# Altium PCB UKU208.PcbDoc (part 1 of 2)
Units mm, origin at the board's own origin, x right, y up, seen from the top; angles counter-clockwise.
Board outline 222.4 x 162.3 mm, 2 copper layers (Top Layer, Bottom Layer); 178 components, 227 nets, 717 pads, 311 vias.
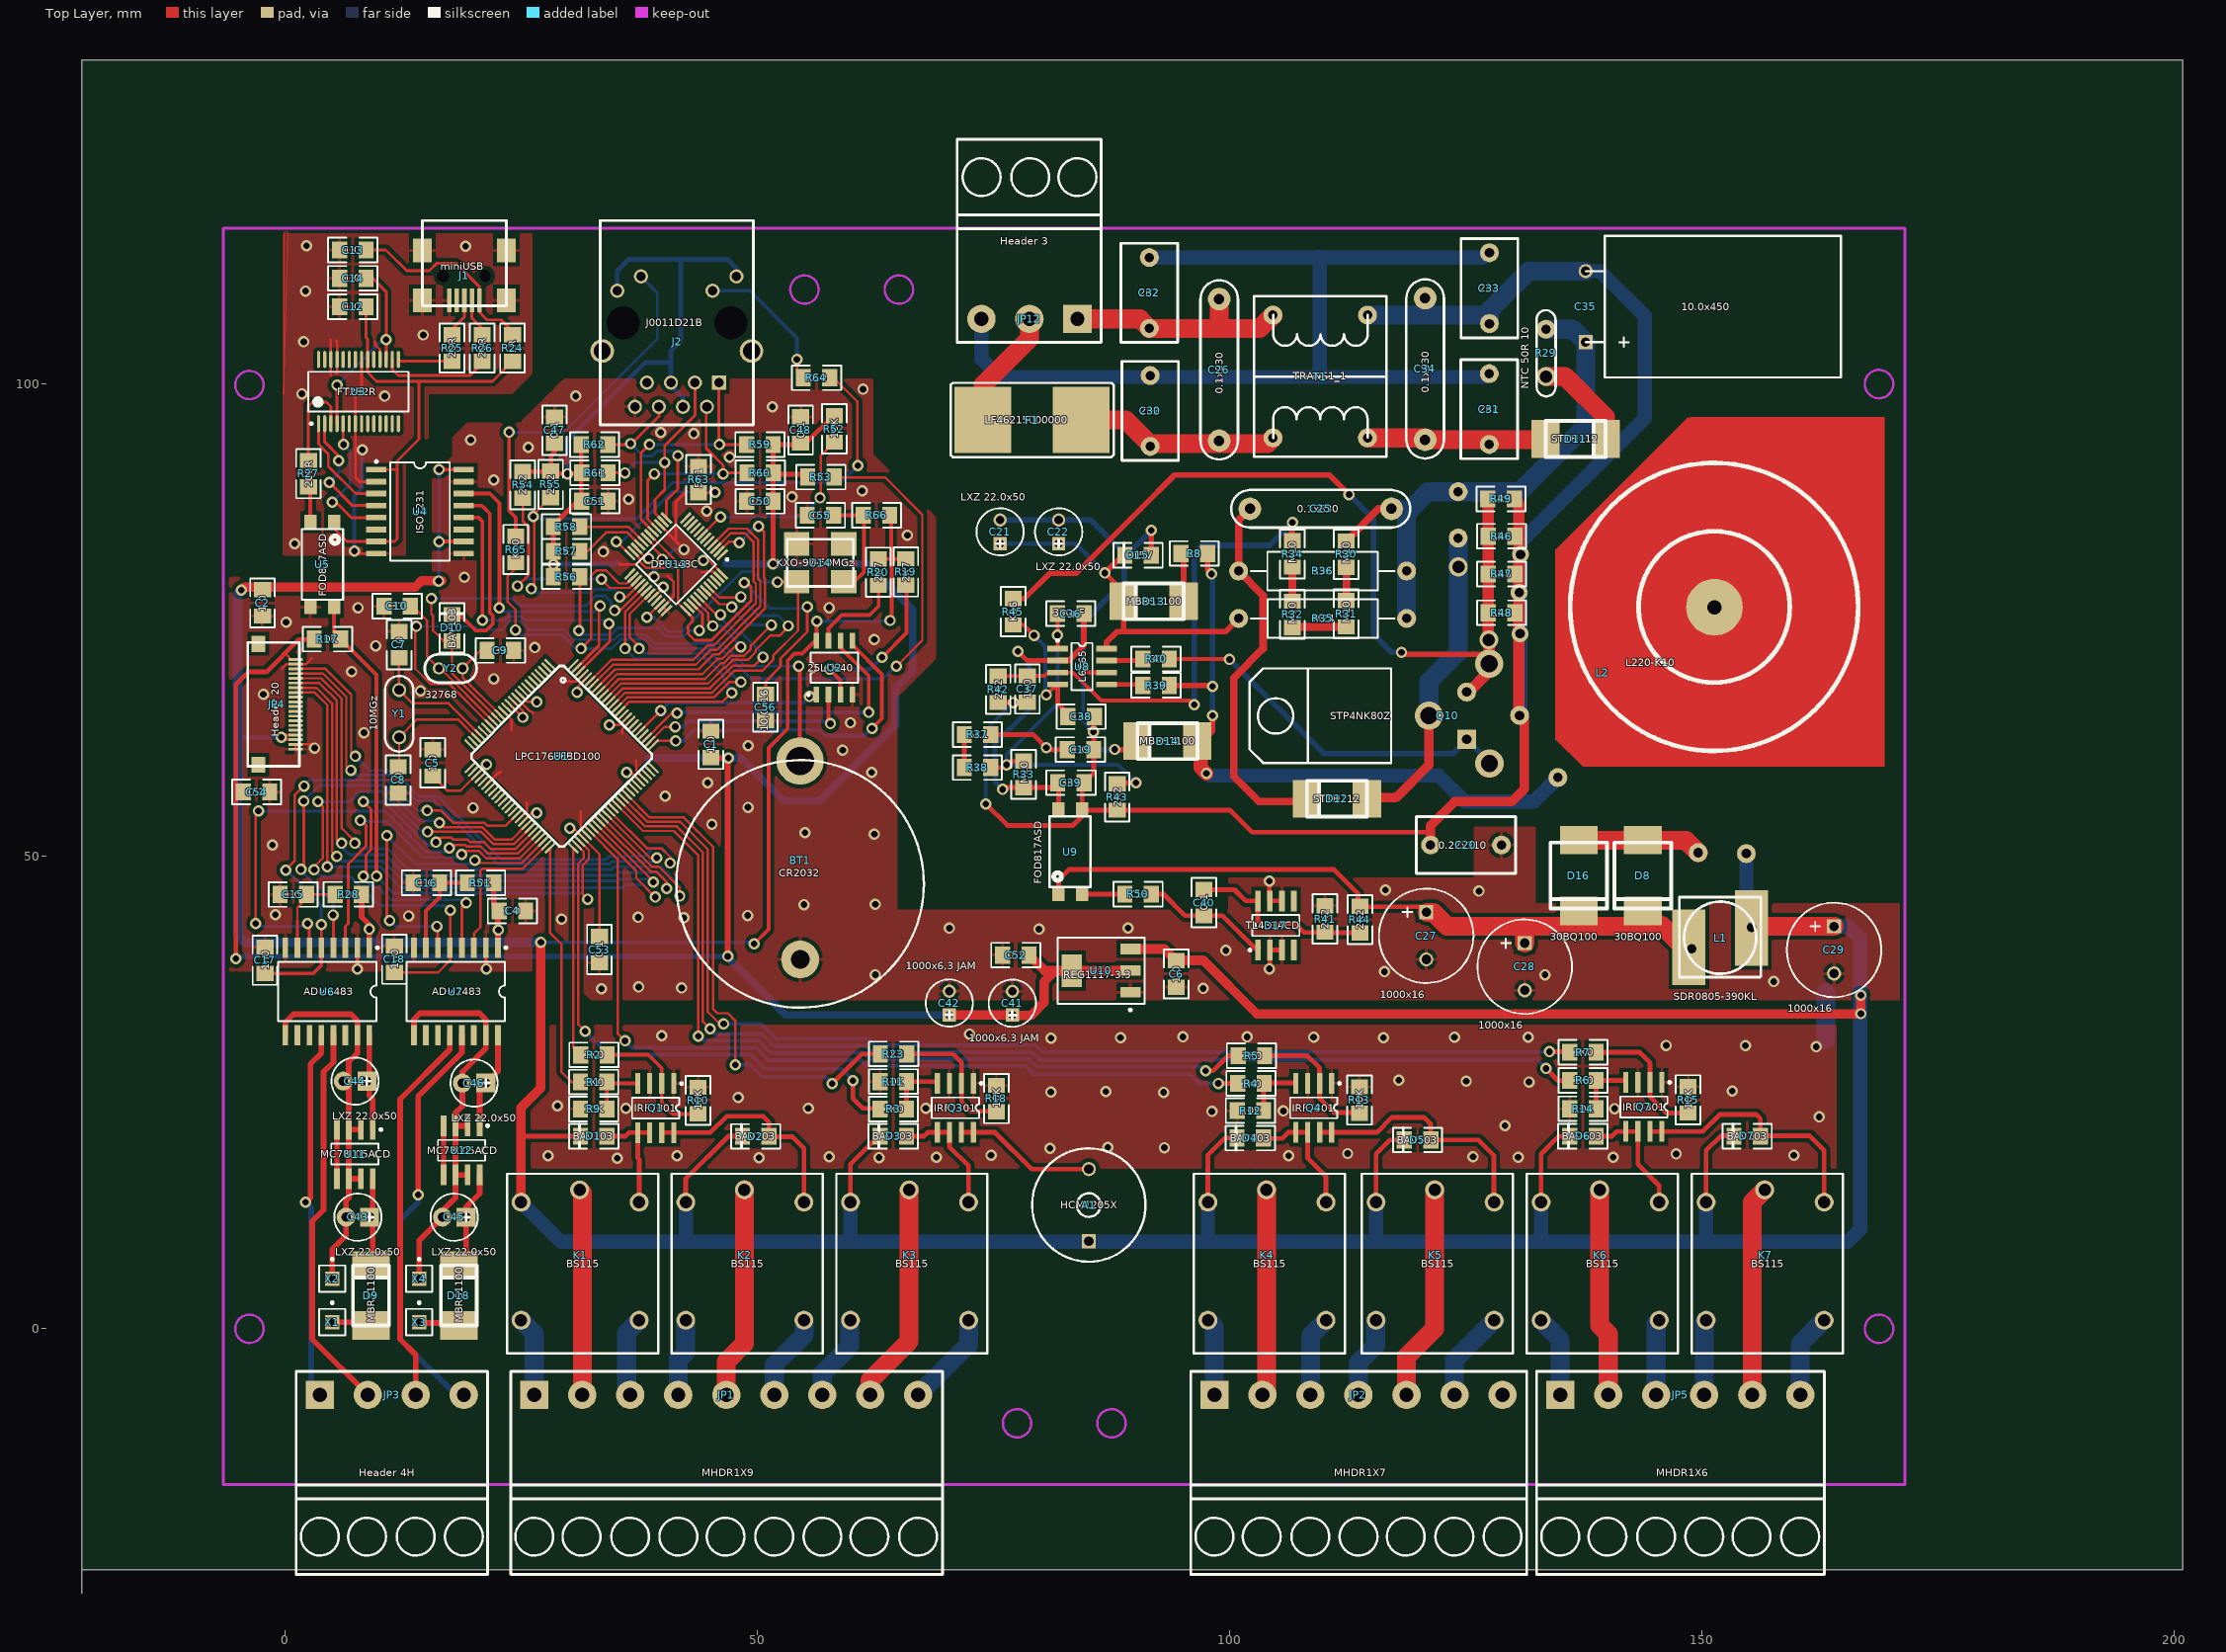
[diagram p0: Top Layer view]
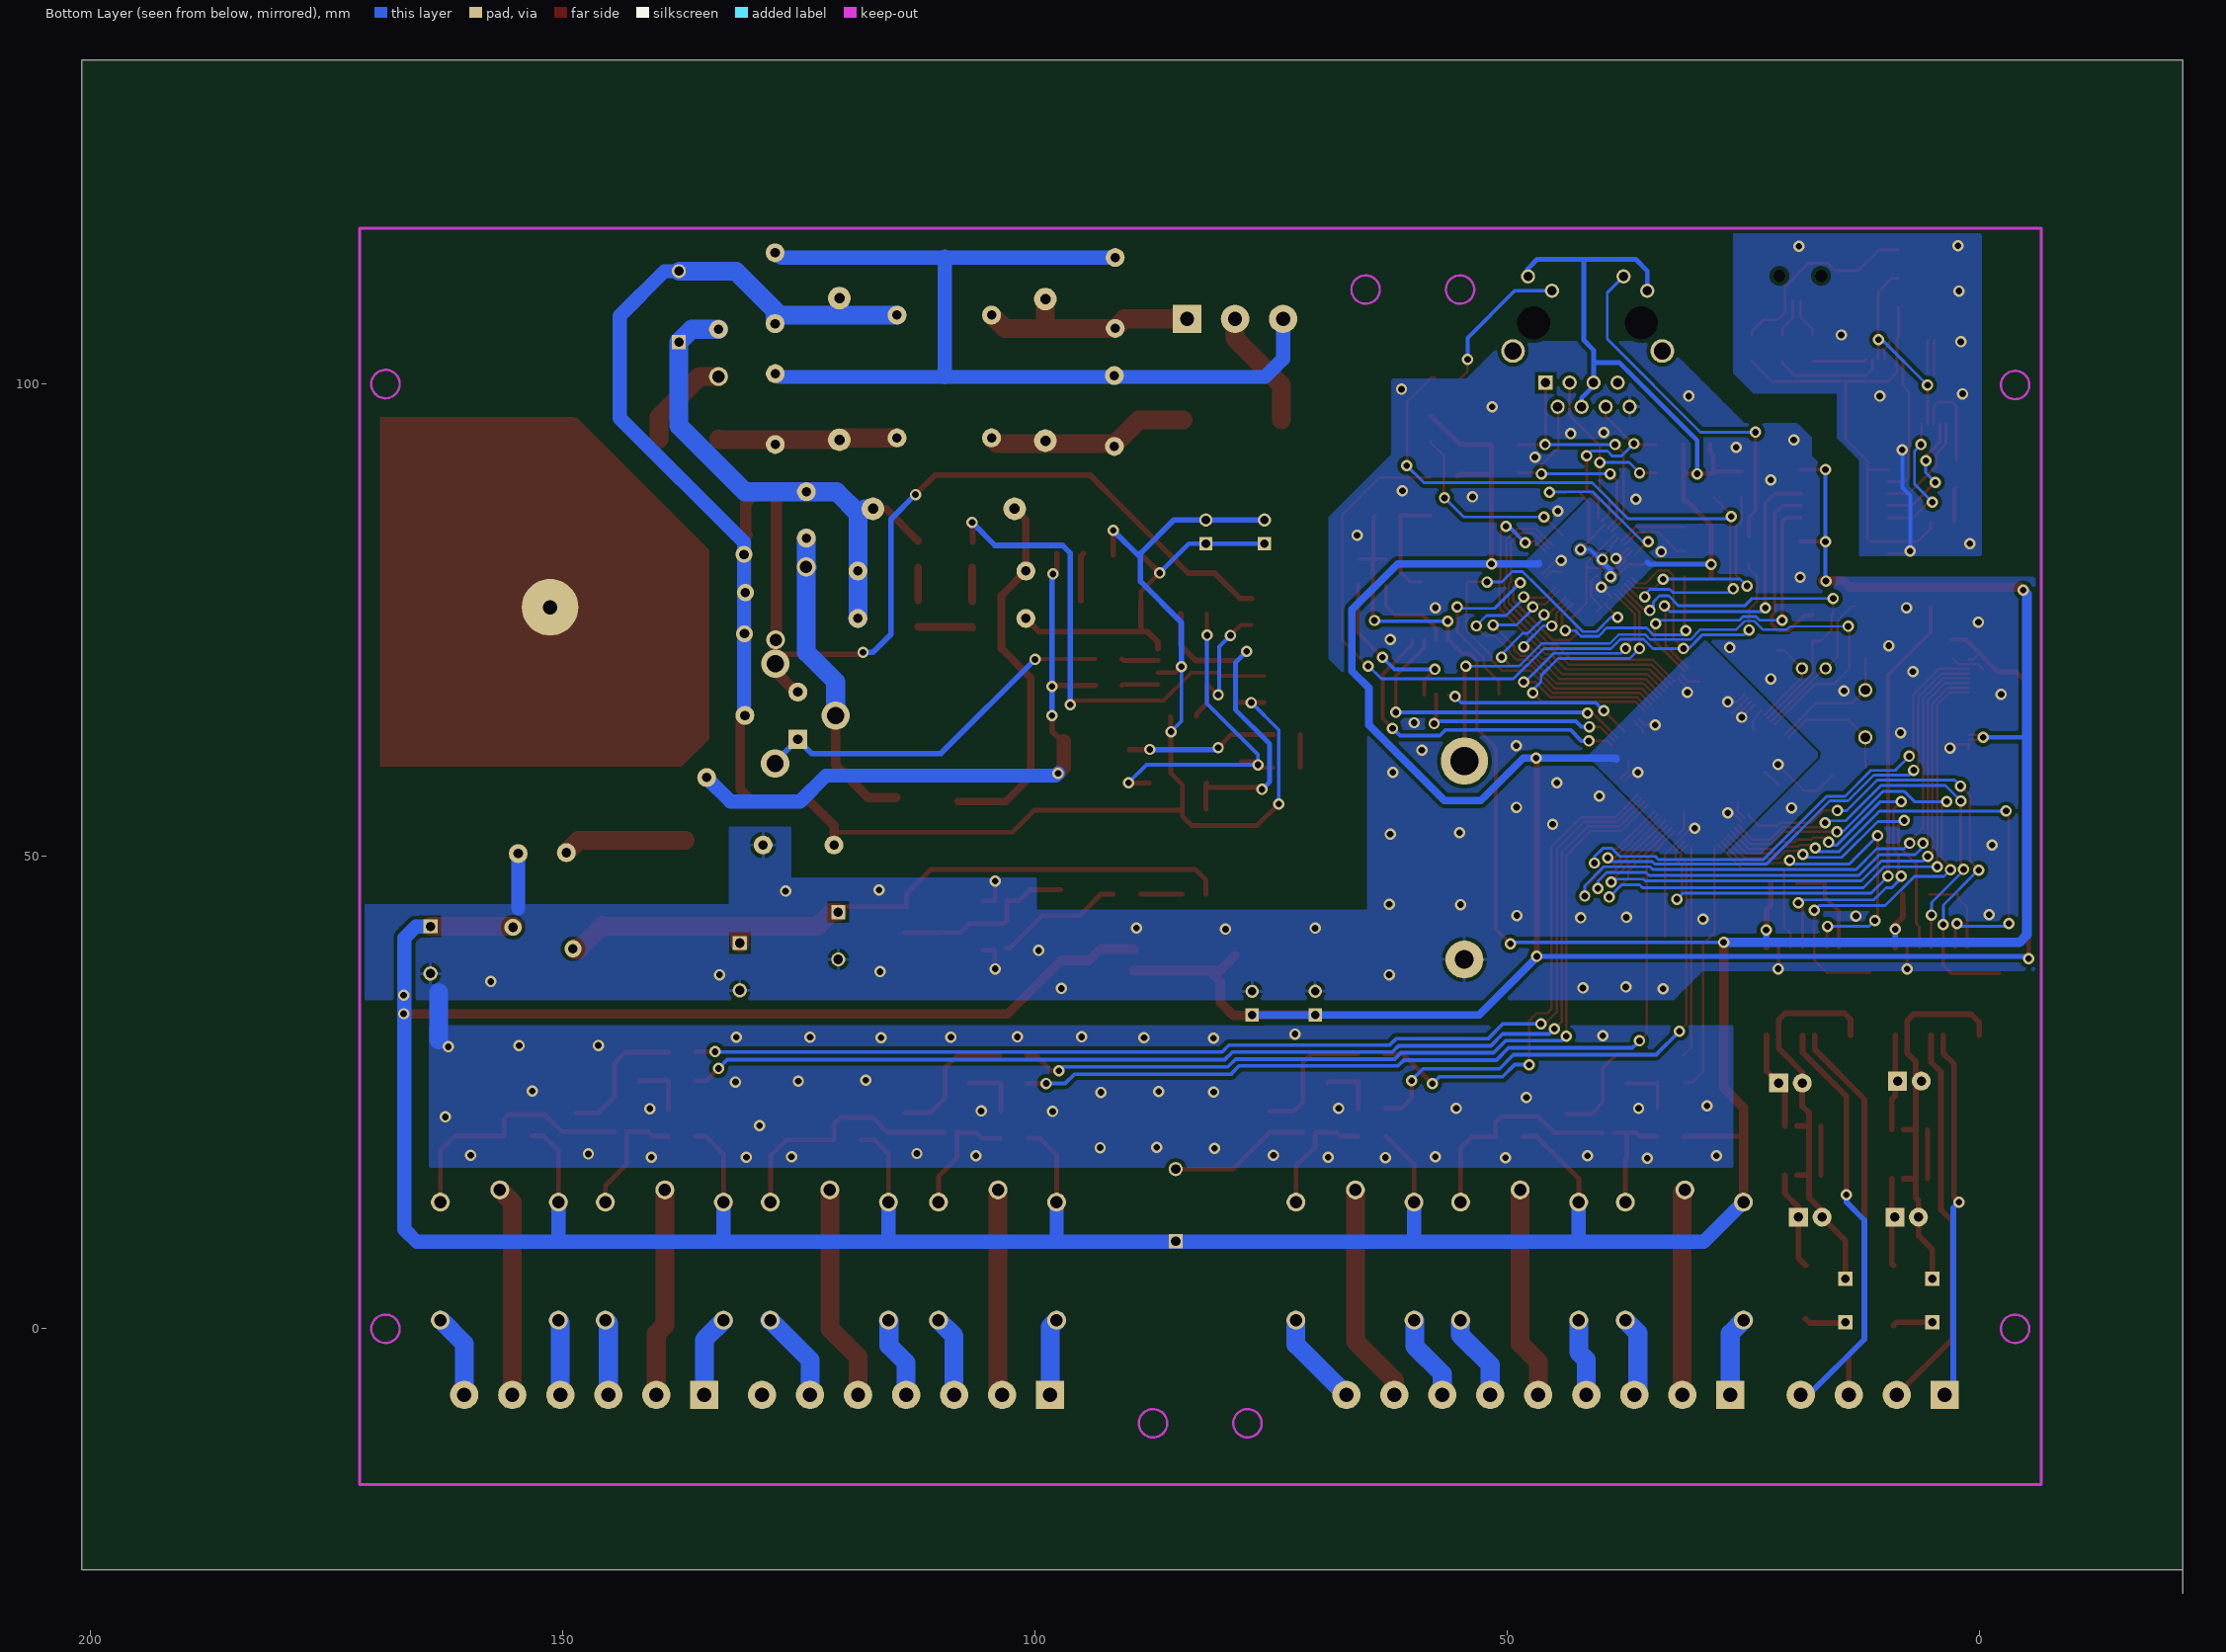
[diagram p1: Bottom Layer view, seen from below]

## Layer stack, top to bottom
Top Layer: signal copper 0.0356
Dielectric: dielectric 0.32, FR-4, Dk 4.8
Bottom Layer: signal copper 0.0356

## Board outline
-21.5,-28 -21.5,134.3 200.9,134.3 200.9,-25.5 -21.5,-25.5

## Design rules (kind name [scope] priority, off if disabled: settings)
Clearance Clearance_2 [InPoly vs InPoly] p1: gap=0.2
Clearance Clearance_1 [All vs InPoly] p2: gap=0.4
Clearance [All] p3: gap=0.19
ComponentClearance [All] p1: gap=0.254 collisioncheckmode=0
HoleSize [All] p1: absolutevalues=TRUE maxlimit=4 minlimit=0.025 maxpercent=80.000 minpercent=20.000
PolygonConnect [All] p1: connectstyle=Relief reliefconductorwidth=0.3 reliefentries=4 polygonreliefangle="90 Angle"
RoutingLayers [All] p1: top layer=Horizontal bottom layer=Vertical
RoutingVias [All] p1: holewidth=0.7 width=1.2 viastyle="Through Hole" minholewidth=0.5 minwidth=1 maxholewidth=0.8 maxwidth=1.5
SolderMaskExpansion [All] p1: expansion=0.102
TestPointUsage [All] p1: valid=0 allowmultiple=FALSE
Testpoint [All] p1: side=15 testpointundercomponent=TRUE minsize=1.016 maxsize=2.54 preferedsize=1.524 minholesize=0 maxholesize=1.016 preferedholesize=0.813 testpointgrid=0.025 style=1023 order=1234567890
Width [All] p1: maxlimit=5 minlimit=0.254 preferedwidth=0.254 toplayer_prefwidth=1.2 bottomlayer_prefwidth=2 minimp=50.000000 maximp=50.000000 favimp=50.000000
15 further rules are at their usual default settings.

## Classes and differential pairs
component class CPU: A1 C1 C2 C4 C5 C6 C7 C8 C9 C10 JP4 Q3 R18 R19 R20 R23 U1 U2 Y1 Y2
component class UKU208_main: BT? C12 C13 C14 C15 C16 C17 C18 C43 C44 C45 C46 C? D1 D2 D3 D4 D5 D6 D7 D9 D10 D18 F? J1 JP1 JP2 JP3 JP5 K1 K2 K3 K4 K5 K6 K7 L? Q1 Q4 Q7 R1 R2 R3 R4 R5 R6 R7 R9 R10 R11 R12 R13 R14 R15 R17 R24 R25 R26 R27 R28 R51 T? U3 U4 U5 U6 U7 U11 U12 X1 X2 X3 X4
component class POWER: BT1 C19 C20 C21 C22 C25 C26 C27 C28 C29 C30 C31 C32 C33 C34 C35 C36 C37 C38 C39 C40 C41 C42 D8 D11 D12 D13 D14 D15 D16 D17 F1 JP12 L1 L2 Q10 R8 R29 R30 R31 R32 R33 R34 R35 R36 R37 R38 R39 R40 R41 R42 R43 R44 R45 R46 R47 R48 R49 R50 T1 U8 U9 U10
component class ETHERNET: C47 C48 C50 C51 C52 C53 C54 C55 C56 J2 R52 R53 R54 R55 R56 R57 R58 R59 R60 R61 R62 R63 R64 R65 R66 U13 U14

## Components (designator, comment, footprint, x,y, rotation, side; value= is the part's Value field where it differs from the comment)
A1 "HCM1205X" zumm 85.1,13.1 r90 top
BT1 "CR2032" BAT_SUPP 54.55,47.1 r0 top
C1 "1.0" _1206#1 45.1,61.875 r90 top
C2 "1.0" _1206#1 -2.375,76.85 r90 top
C4 "1.0" _1206#1 24.075,44.225 r180 top
C5 "1.0" _1206#1 15.65,59.9 r270 top
C6 "1.0" _1206#1 94.35,37.575 r90 top
C7 "10" _1206#1 12.1,72.4 r270 top
C8 "10" _1206#1 12,58.1 r90 top
C9 "33" _1206#1 22.8,71.8 r180 top
C10 "33" _1206#1 11.9,76.5 r0 top
C12 "1.0" _1206#1 7.2,108.2 r0 top
C13 "1.0" _1206#1 7.2,114.2 r0 top
C14 "1.0" _1206#1 7.2,111.2 r0 top
C15 "1.0" _1206#1 0.9,45.975 r0 top
C16 "1.0" _1206#1 15,47.2 r0 top
C17 "1n0" _1206#1 -2.1,39 r270 top
C18 "1n0" _1206#1 11.6,39.1 r270 top
C19 "1.0" _1206#1 84.2,61.3 r180 top
C20 "0.22x310" C8 128.775,51.2 r180 top
C21 "LXZ 22.0x50" el3#1 75.7,83.1 r90 top
C22 "LXZ 22.0x50" el3#1 81.899,83.1 r90 top
C25 "0.1x630" c15 109.65,86.8 r0 top
C26 "0.1x630" c15 98.9,101.5 r270 top
C27 "1000x16" el5 120.825,39.1 r90 top
C28 "1000x16" el5 131.25,35.825 r90 top
C29 "1000x16" el5 164,37.6 r90 top
C30 "2n2" C8 91.6,100.9 r270 top
C31 "2n2" c8 127.5,101.1 r270 top
C32 "2n2" c8 91.5,105.9 r90 top
C33 "2n2" c8 127.5,106.4 r90 top
C34 "0.1x630" c15 120.7,101.6 r270 top
C35 "10.0x450" el_15_25_h 137.7,108.2 r270 top
C36 "390pF" _1206#1 83.2,75.7 r0 top
C37 "1n0" _1206#1 78.601,67.7 r270 top
C38 "1n0" _1206#1 84.3,64.8 r0 top
C39 "3n3" _1206#1 83.2,57.8 r180 top
C40 "0.1" _1206#1 97.3,45.1 r270 top
C41 "1000x6,3 JAM" el3#1 77,33.2 r90 top
C42 "1000x6,3 JAM" el3#1 70.325,33.225 r90 top
C43 "LXZ 22.0x50" el3#2 9,11.8 r180 top
C44 "LXZ 22.0x50" el3#2 8.7,26.2 r180 top
C45 "LXZ 22.0x50" el3#2 19.2,11.8 r180 top
C46 "LXZ 22.0x50" el3#2 21.3,26 r180 top
C47 "0.1" _1206#1 28.55,95.1 r270 top
C48 "0.1" _1206#1 54.6,95.125 r270 top
C50 "0.1" _1206#1 50.3,87.6 r0 top
C51 "0.1" _1206#1 32.8,87.6 r180 top
C52 "0.1" _1206#2 77.35,39.55 r180 top
C53 "0.1" _1206#2 33.3,40.125 r270 top
C54 "0.1" _1206#2 -2.975,56.825 r0 top
C55 "0.1" _1206#2 56.675,86.1 r180 top
C56 "10,0x16" _1206#1 50.875,65.775 r270 top
D1 "BAV103" _1206d 32.7,20.4 r0 top
D2 "BAV103" _1206d 49.85,20.375 r0 top
D3 "BAV103" _1206d 64.4,20.4 r0 top
D4 "BAV103" _1206d 102.2,20.201 r0 top
D5 "BAV103" _1206d 119.9,20 r0 top
D6 "BAV103" _1206d 137.4,20.4 r0 top (schematic designator D?)
D7 "BAV103" _1206d 154.8,20.4 r0 top
D8 "30BQ100" 30BQ100 143.725,47.975 r90 top
D9 "MBRS1100" D_6_3#1 9.1,6.7 r270 top
D10 "BAV103" _1206d 17.7,74.2 r270 top
D11 "STTH112" D_6_3#2 139.8,94.2 r180 top
D12 "STTH112" D_6_3#2 108.2,56.1 r0 top
D13 "MBRS1100" D_6_3#2 88.8,77 r0 top
D14 "MBRS1100" D_6_3#2 90.25,62.2 r0 top
D15 "C15V" _1206d 90.325,81.9 r0 top
D16 "30BQ100" 30BQ100 136.95,47.975 r90 top
D17 "TL431ACD" SO-G8#1 104.9,42.7 r0 top
D18 "MBRS1100" D_6_3#1 18.4,6.7 r270 top
F1 "LF46215000000" LF462 79.1,96.2 r180 top
J1 "miniUSB" USBmini 19,117.3 r180 top
J2 "J0011D21B" J0011D21B 41.5,106.5 r0 top
JP1 "MHDR1X9" 2EDGR-5.08-9P 26.4,-7 r0 top (schematic designator JP5)
JP2 "MHDR1X7" 2EDGR-5.08-7P 98.4,-7 r0 top (schematic designator JP6)
JP3 "Header 4H" 2EDGR-5.08-4P 3.7,-7 r0 top
JP4 "Header 20" XF2M20151A -0.9,66.1 r270 top
JP5 "MHDR1X6" 2EDGR-5.08-6P 135,-7 r0 top (schematic designator JP7)
JP12 "Header 3" 2EDGR-5.08-3P 83.9,106.9 r180 top
K1 "BS115" bs115 37.5,13.4 r180 top (schematic designator K?)
K2 "BS115" bs115 54.933,13.4 r180 top (schematic designator K?)
K3 "BS115" bs115 72.367,13.4 r180 top (schematic designator K?)
K4 "BS115" bs115 110.2,13.4 r180 top (schematic designator K?)
K5 "BS115" bs115 128,13.4 r180 top (schematic designator K?)
K6 "BS115" bs115 145.467,13.4 r180 top (schematic designator K?)
K7 "BS115" bs115 162.933,13.4 r180 top (schematic designator K?)
L1 "SDR0805-390KL" L10x10 157,36.3 r90 top
L2 "L220-K10" trans_ring1 151.3,76.4 r0 top
Q1 "IRF7301" SO-G8/Y2.2 39.25,23.375 r180 top
Q3 "IRF7301" SO-G8/Y2.2 70.975,23.4 r180 top (schematic designator Q?)
Q4 "IRF7301" SO-G8/Y2.2 108.9,23.4 r180 top (schematic designator Q?)
Q7 "IRF7301" SO-G8/Y2.2 143.85,23.5 r180 top (schematic designator Q?)
Q10 "STP4NK80Z" TO220_h 109.6,64.9 r90 top
R1 "1K0" _1206#1 32.7,26.125 r0 top
R2 "1K0" _1206#1 32.725,29 r0 top (schematic designator R?)
R3 "1K0" _1206#1 64.425,23.275 r0 top (schematic designator R?)
R4 "1K0" _1206#1 102.275,25.975 r0 top
R5 "1K0" _1206#1 102.325,28.9 r0 top (schematic designator R?)
R6 "1K0" _1206#1 137.425,26.3 r0 top (schematic designator R?)
R7 "1K0" _1206#1 137.425,29.275 r0 top
R8 "20" _1206#1 96.275,82.075 r0 top
R9 "10K" _1206#1 32.7,23.275 r0 top
R10 "10K" _1206#1 43.75,24.15 r270 top (schematic designator R?)
R11 "10K" _1206#1 64.425,26.175 r0 top (schematic designator R?)
R12 "10K" _1206#1 102.225,23.1 r0 top (schematic designator R?)
R13 "10K" _1206#1 113.75,24.2 r270 top (schematic designator R?)
R14 "10K" _1206#1 137.425,23.3 r0 top (schematic designator R?)
R15 "10K" _1206#1 148.55,24.225 r270 top (schematic designator R?)
R17 "10K" _1206#1 4.5,73 r180 top
R18 "10K" _1206#1 75.325,24.35 r270 top
R19 "2K7" _1206#1 65.725,80.125 r90 top
R20 "2K7" _1206#1 62.825,80.075 r270 top
R23 "1K0" _1206#1 64.45,29.1 r0 top
R24 "1R" _1206#1 24.1,103.8 r270 top
R25 "20R" _1206#1 17.7,103.8 r270 top
R26 "20R" _1206#1 20.9,103.8 r270 top
R27 "200R" _1206#1 2.5,90.5 r270 top
R28 "10K" _1206#1 6.7,45.975 r180 top
R29 "NTC 50R 10" JVR07N 133.5,105.8 r270 top
R30 "M10" _1206#1 112.35,82 r90 top
R31 "M10" _1206#1 112.35,75.7 r90 top
R32 "M10" _1206#1 106.65,75.6 r270 top
R33 "M10" _1206#1 78.2,58.7 r90 top
R34 "M10" _1206#1 106.65,82 r270 top
R35 "M24" AXIAL-0.7 109.85,75.2 r0 top
R36 "39K" AXIAL-0.7 109.85,80.2 r180 top
R37 "5K1" _1206#1 73.3,62.9 r180 top
R38 "6K2" _1206#1 73.3,59.4 r180 top
R39 "51K" _1206#1 92.2,68.1 r180 top
R40 "30" _1206#1 92.2,70.9 r180 top
R41 "2K2" _1206#1 110.1,43.4 r90 top
R42 "2K2" _1206#1 75.5,67.7 r90 top
R43 "2K2" _1206#1 88.1,56.3 r90 top
R44 "2K2" _1206#1 113.8,43.3 r270 top
R45 "K56" _1206#1 77.1,75.9 r270 top
R46 "6R8" _1206#1 128.8,83.9 r0 top
R47 "6R8" _1206#1 128.8,79.9 r0 top
R48 "6R8" _1206#1 128.8,75.8 r0 top
R49 "6R8" _1206#1 128.75,87.85 r0 top
R50 "K18" _1206#1 90.3,46 r180 top
R51 "10K" _1206#1 20.7,47.2 r180 top
R52 "10K" _1206#2 58.15,95.275 r90 top
R53 "2K2" _1206#2 56.725,90.15 r180 top
R54 "2K2" _1206#2 25.175,89.35 r90 top
R55 "2K2" _1206#2 28.125,89.4 r90 top
R56 "2K2" _1206#2 29.8,79.6 r180 top
R57 "2K2" _1206#2 29.8,82.3 r180 top
R58 "2K2" _1206#2 29.8,84.9 r180 top
R59 "51R" _1206#2 50.3,93.6 r0 top
R60 "51R" _1206#2 50.3,90.6 r180 top
R61 "51R" _1206#2 32.8,90.6 r180 top
R62 "51R" _1206#2 32.8,93.6 r0 top
R63 "5K1" _1206#2 43.8,89.875 r270 top
R64 "K10" _1206#2 56.3,100.675 r0 top
R65 "K10" _1206#2 24.45,82.475 r270 top
R66 "1R" _1206#2 62.65,86.125 r0 top
T1 "TRANS1_1" 3030R4 109.6,100.8 r0 top
U1 "LPC1768FBD100" LPC2368 29.3,60.6 r225 top
U2 "25LC640" SO-G8/D5 58.175,69.975 r0 top
U3 "FT232R" SOP65P780-28L 7.8,99.2 r90 top
U4 "ISO7231" SO-G16/D10.4#1 14.3,86.5 r270 top
U5 "FOD817ASD" FOD817ASD 5.2,85.4 r180 top
U6 "ADM2483" SO-G16/D10.4#2 4.5,35.7 r180 top
U7 "ADM2483" SO-G16/D10.4#2 18.1,35.7 r180 top
U8 "L6565" so-g8 84.4,70.1 r270 top
U9 "FOD817ASD" FOD817ASD 81.9,46 r0 top
U10 "REG1117-3.3" DSO-G3 86.4,37.9 r90 top
U11 "MC78L05ACD" SO-G8#2 7.4,18.5 r180 top
U12 "MC78L05ACD" SO-G8#2 18.7,18.9 r180 top
U13 "DP8348C" F-QFP7X7-G48/N 41.4,80.9 r225 top
U14 "KXO-97-50MGz" KXO-97 56.675,81.075 r180 top
X1 "" PIN1 5,0.7 r0 top
X2 "" PIN1 5,5.3 r0 top
X3 "" PIN1 14.2,0.7 r0 top
X4 "" PIN1 14.2,5.3 r0 top
Y1 "10MGz" QWARZ1 12.1,62.6 r90 top
Y2 "32768" QWARZ2 16.3,69.9 r0 top

## Footprints (in the part's own frame and the unit in brackets; to place one, negate y for a bottom-side part, rotate by r counter-clockwise, add the part's x,y. Pads: shape width x height; smd on the part's side, far side on the other; paste and mask are expansions set on the pad)
2EDGR-5.08-3P [mm]
  rect 3x3 hole 1.5: 1(0,0)
  round 3 hole 1.5: 2(5.08,0) 3(10.16,0)
  silkscreen extent -2.5,-19 12.74,2.5
2EDGR-5.08-4P [mm]
  rect 3x3 hole 1.5: 1(0,0)
  round 3 hole 1.5: 2(5.08,0) 3(10.16,0) 4(15.24,0)
  silkscreen extent -2.5,-19 17.75,2.5
2EDGR-5.08-6P [mm]
  rect 3x3 hole 1.5: 1(0,0)
  round 3 hole 1.5: 2(5.08,0) 3(10.16,0) 4(15.24,0) 5(20.33,0) 6(25.41,0)
  silkscreen extent -2.5,-19 27.98,2.5
2EDGR-5.08-7P [mm]
  rect 3x3 hole 1.5: 1(0,0)
  round 3 hole 1.5: 2(5.08,0) 3(10.16,0) 4(15.24,0) 5(20.33,0) 6(25.41,0) 7(30.49,0)
  silkscreen extent -2.5,-19 33.06,2.5
2EDGR-5.08-9P [mm]
  rect 3x3 hole 1.5: 1(0,0)
  round 3 hole 1.5: 2(5.08,0) 3(10.16,0) 4(15.24,0) 5(20.33,0) 6(25.41,0) 7(30.49,0) 8(35.555,0) 9(40.635,0)
  silkscreen extent -2.5,-19 43.22,2.5
30BQ100 [mm]
  rect 3x4 smd: 1(3.753,-0.01) 2(-3.747,-0.01)
  silkscreen extent -3.5,-3.01 3.5,2.99
3030R4 [mm]
  round 2 hole 1: 1(-5,6.5) 2(5,6.5) 3(-5,-6.5) 4(5,-6.5)
  silkscreen extent -7,-8.5 7,8.5
_1206#1 [mm]
  rect 1.6x1.8 smd: 1(-1.412,-0.007) 2(1.388,-0.007)
  silkscreen extent -2.61,-1.31 2.59,1.29
_1206#2 [mm]
  rect 1.6x1.8 smd: 1(-1.418,-0.005) 2(1.382,-0.005)
  silkscreen extent -2.62,-1.3 2.58,1.3
_1206d [mm]
  rect 1.6x1.8 smd: 1(1.395,-0.009) 2(-1.405,-0.009)
  silkscreen extent -2.6,-1.31 2.6,1.29
AXIAL-0.7 [mm]
  round 2 hole 1: 1(-8.887,-0.008) 2(8.893,-0.008)
  silkscreen extent -7.62,-2.04 7.62,2.02
BAT_SUPP [mm]
  round 5 hole 3: 1(-0.009,12.995)
  round 4 hole 2: 2(-0.009,-8.005)
  silkscreen extent -13.11,-13.1 13.09,13.09
bs115 [mm]
  round 2 hole 1.3: 1(6.292,-1.304) 2(-0.008,12.496) 3(12.492,12.496) 4(-0.008,-0.004) 5(12.492,-0.004)
  silkscreen extent -2.01,-3 13.99,16
C8 [mm]
  round 2 hole 1: 1(-0.002,-0.008) 2(7.498,-0.008)
  silkscreen extent -1.5,-3.01 9,2.99
c8 [mm]
  round 2 hole 1: 1(-0.002,-0.008) 2(7.498,-0.008)
  silkscreen extent -1.5,-3.01 9,2.99
c15 [mm]
  round 2.4 hole 1.1: 1(-7.5,0) 2(7.5,0)
  silkscreen extent -9.48,-2 9.48,2
D_6_3#1 [mm]
  rect 3x4 smd: 1(6.34,0.014) 2(-0.01,0.014)
  silkscreen extent -0.01,-1.89 6.34,1.92
D_6_3#2 [mm]
  rect 3x4 smd: 1(6.341,0.006) 2(-0.009,0.006)
  silkscreen extent -0.01,-1.9 6.34,1.91
DSO-G3 [mm]
  rect 1.1x2.15 smd: 1(-2.3,-3.1) 2(0,-3.1) 3(2.3,-3.1)
  rect 3.5x2.15 smd: 4(0,3.1)
  silkscreen extent -4.27,-4.6 3.5,4.6
el3#1 [mm]
  rect 1.4x1.4 hole 0.9: 1(0.011,-0.008)
  round 1.4 hole 0.9: 2(2.511,-0.008)
  silkscreen extent -1.24,-2.51 3.76,2.49
el3#2 [mm]
  rect 2x2 hole 1: 1(0.021,-0.014)
  round 2 hole 1: 2(2.521,-0.014)
  silkscreen extent -1.23,-2.51 3.77,2.48
el5 [mm]
  rect 1.5x1.5 hole 1: 1(5.001,0.007)
  round 1.5 hole 1: 2(0.001,0.007)
  silkscreen extent -2.5,-4.99 7.5,5
el_15_25_h [mm]
  rect 1.5x1.5 hole 1: 1(3.75,0)
  round 1.5 hole 1: 2(-3.75,0)
  silkscreen extent -7.5,0 7.5,27
F-QFP7X7-G48/N [mm]
  rect 1.55x0.3 smd: 1(-4.192,2.749) 2(-4.192,2.249) 3(-4.192,1.749) 4(-4.192,1.249) 5(-4.192,0.749) 6(-4.192,0.249) 7(-4.192,-0.251) 8(-4.192,-0.751) 9(-4.192,-1.251) 10(-4.192,-1.751) 11(-4.192,-2.251) 12(-4.192,-2.751) 25(4.158,-2.751) 26(4.158,-2.251) 27(4.158,-1.751) 28(4.158,-1.251) 29(4.158,-0.751) 30(4.158,-0.251) 31(4.158,0.249) 32(4.158,0.749) 33(4.158,1.249) 34(4.158,1.749) 35(4.158,2.249) 36(4.158,2.749)
  rect 0.3x1.55 smd: 13(-2.767,-4.176) 14(-2.267,-4.176) 15(-1.767,-4.176) 16(-1.267,-4.176) 17(-0.767,-4.176) 18(-0.267,-4.176) 19(0.233,-4.176) 20(0.733,-4.176) 21(1.233,-4.176) 22(1.733,-4.176) 23(2.233,-4.176) 24(2.733,-4.176) 37(2.733,4.174) 38(2.233,4.174) 39(1.733,4.174) 40(1.233,4.174) 41(0.733,4.174) 42(0.233,4.174) 43(-0.267,4.174) 44(-0.767,4.174) 45(-1.267,4.174) 46(-1.767,4.174) 47(-2.267,4.174) 48(-2.767,4.174)
  silkscreen extent -4.32,-3 2.98,3.57
FOD817ASD [mm]
  rect 1.3x1.5 smd: 1(0,0) 2(2.5,0) 3(2.5,9) 4(0,9)
  silkscreen extent -0.97,0.75 3.4,8.22
J0011D21B [mm]
  round 2.5 hole 1.8: 0(-7.9,-3) 0(7.9,-3)
  round 1.5 hole 3.5: 0(-5.7,0) 0(5.7,0)
  rect 1.5x1.5 hole 1: 1(4.445,-6.35)
  round 1.5 hole 1: 2(3.175,-8.9) 3(1.905,-6.35) 4(0.635,-8.9) 5(-0.635,-6.35) 6(-1.905,-8.9) 7(-3.175,-6.35) 8(-4.445,-8.9) 9(6.31,4.9) 10(3.77,3.38) 11(-3.8,4.9) 12(-6.31,3.38)
  silkscreen extent -8.1,-10.8 8.1,10.8
JVR07N [mm]
  round 2 hole 1: 1(0,0)
  round 2 hole 1.3: 2(5,0)
  silkscreen extent -2.01,-1.02 7.09,1.02
KXO-97 [mm]
  rect 2.7x2.5 smd: 1(-2.5,-2) 2(2.5,-2) 3(2.5,2) 4(-2.5,2)
  silkscreen extent -3.5,-2.5 3.5,2.5
L10x10 [mm]
  rect 8x3.5 smd: 1(4.075,8.372) 2(6.107,1.768)
  silkscreen extent 0.9,0.75 9.41,9.39
LF462 [mm] "LF462"
  rect 6x7 smd: 1(-5.2,0) 2(5.2,0)
  silkscreen extent -8.62,-3.93 8.62,3.93
LPC2368 [mm]
  rect 0.25x1.5 smd: 1(-6,-7.775)
  oval 0.25x1.5 smd: 2(-5.5,-7.75) 3(-5,-7.75) 4(-4.5,-7.75) 5(-4,-7.75) 6(-3.5,-7.75) 7(-3,-7.75) 8(-2.5,-7.75) 9(-2,-7.75) 10(-1.5,-7.75) 11(-1,-7.75) 12(-0.5,-7.75) 13(0,-7.75) 14(0.5,-7.75) 15(1,-7.75) 16(1.5,-7.75) 17(2,-7.75) 18(2.5,-7.75) 19(3,-7.75) 20(3.5,-7.75) 21(4,-7.75) 22(4.5,-7.75) 23(5,-7.75) 24(5.5,-7.75) 25(6,-7.75) 51(6,7.75) 52(5.5,7.75) 53(5,7.75) 54(4.5,7.75) 55(4,7.75) 56(3.5,7.75) 57(3,7.75) 58(2.5,7.75) 59(2,7.75) 60(1.5,7.75) 61(1,7.75) 62(0.5,7.75) 63(0,7.75) 64(-0.5,7.75) 65(-1,7.75) 66(-1.5,7.75) 67(-2,7.75) 68(-2.5,7.75) 69(-3,7.75) 70(-3.5,7.75) 71(-4,7.75) 72(-4.5,7.75) 73(-5,7.75) 74(-5.5,7.75) 75(-6,7.75)
  oval 1.5x0.25 smd: 26(7.75,-6) 27(7.75,-5.5) 28(7.75,-5) 29(7.75,-4.5) 30(7.75,-4) 31(7.75,-3.5) 32(7.75,-3) 33(7.75,-2.5) 34(7.75,-2) 35(7.75,-1.5) 36(7.75,-1) 37(7.75,-0.5) 38(7.75,0) 39(7.75,0.5) 40(7.75,1) 41(7.75,1.5) 42(7.75,2) 43(7.75,2.5) 44(7.75,3) 45(7.75,3.5) 46(7.75,4) 47(7.75,4.5) 48(7.75,5) 49(7.75,5.5) 50(7.75,6) 76(-7.75,6) 77(-7.75,5.5) 78(-7.75,5) 79(-7.775,4.475) 80(-7.75,4) 81(-7.75,3.5) 82(-7.75,3) 83(-7.75,2.5) 84(-7.75,2) 85(-7.75,1.5) 86(-7.75,1) 87(-7.75,0.5) 88(-7.75,0) 89(-7.75,-0.5) 90(-7.75,-1) 91(-7.75,-1.5) 92(-7.75,-2) 93(-7.75,-2.5) 94(-7.775,-3.025) 95(-7.75,-3.5) 96(-7.75,-4) 97(-7.75,-4.5) 98(-7.75,-5) 99(-7.75,-5.5) 100(-7.75,-6)
  silkscreen extent -6.93,-6.93 6.93,6.93
PIN1 [mm]
  rect 1.5x1.5 hole 0.9: 1(0.012,0.005)
  silkscreen extent -1.39,-1.4 1.41,2.18
QWARZ1 [mm]
  round 1.5 hole 1: 1(0.008,0) 2(5.008,0)
  silkscreen extent -1.49,-1.5 6.51,1.5
QWARZ2 [mm]
  round 1.3 hole 0.8: 1(0.001,0.005) 2(2.501,0.005)
  silkscreen extent -1.5,-1.5 4,1.5
SO-G8#1 [mm]
  rect 0.6x2.2 smd: 1(-1.902,-2.611) 2(-0.632,-2.611) 3(0.638,-2.611) 4(1.908,-2.611) 5(1.908,2.589) 6(0.638,2.589) 7(-0.632,2.589) 8(-1.902,2.589)
  silkscreen extent -2.88,-2.74 2.5,1.09
SO-G8#2 [mm]
  rect 0.6x2.2 smd: 1(-1.91,-2.589) 2(-0.64,-2.589) 3(0.63,-2.589) 4(1.9,-2.589) 5(1.9,2.611) 6(0.63,2.611) 7(-0.64,2.611) 8(-1.91,2.611)
  silkscreen extent -2.88,-2.71 2.5,1.11
so-g8 [mm]
  rect 0.6x2.2 smd: 1(-1.902,-2.611) 2(-0.632,-2.611) 3(0.638,-2.611) 4(1.908,-2.611) 5(1.908,2.589) 6(0.638,2.589) 7(-0.632,2.589) 8(-1.902,2.589)
  silkscreen extent -2.88,-2.74 2.5,1.09
SO-G8/D5 [mm]
  rect 0.6x1.7 smd: 1(-1.905,-2.85) 2(-0.635,-2.85) 3(0.635,-2.85) 4(1.905,-2.85) 5(1.905,2.85) 6(0.635,2.85) 7(-0.635,2.85) 8(-1.905,2.85)
  silkscreen extent -2.88,-2.97 2.5,1.6
SO-G8/Y2.2 [mm]
  rect 0.55x2.2 smd: 1(-1.91,-2.588) 2(-0.64,-2.588) 3(0.63,-2.588) 4(1.9,-2.588) 5(1.9,2.612) 6(0.63,2.612) 7(-0.64,2.612) 8(-1.91,2.612)
  silkscreen extent -2.86,-2.71 2.49,1.11
SO-G16/D10.4#1 [mm]
  rect 0.6x2.15 smd: 1(-4.45,-4.618) 2(-3.18,-4.618) 3(-1.91,-4.618) 4(-0.64,-4.618) 5(0.63,-4.618) 6(1.9,-4.618) 7(3.17,-4.618) 8(4.44,-4.618) 9(4.44,4.632) 10(3.17,4.632) 11(1.9,4.632) 12(0.63,4.632) 13(-0.64,4.632) 14(-1.91,4.632) 15(-3.18,4.632) 16(-4.45,4.632)
  silkscreen extent -5.42,-4.74 5.2,3.16
SO-G16/D10.4#2 [mm]
  rect 0.6x2.15 smd: 1(-4.445,-4.625) 2(-3.175,-4.625) 3(-1.905,-4.625) 4(-0.635,-4.625) 5(0.635,-4.625) 6(1.905,-4.625) 7(3.175,-4.625) 8(4.445,-4.625) 9(4.445,4.625) 10(3.175,4.625) 11(1.905,4.625) 12(0.635,4.625) 13(-0.635,4.625) 14(-1.905,4.625) 15(-3.175,4.625) 16(-4.445,4.625)
  silkscreen extent -5.42,-4.75 5.2,3.15
SOP65P780-28L [mm]
  oval 1.8x0.35 smd: 1(-3.396,4.231) 2(-3.396,3.581) 3(-3.396,2.931) 4(-3.396,2.281) 5(-3.396,1.631) 6(-3.396,0.981) 7(-3.396,0.331) 8(-3.396,-0.319) 9(-3.396,-0.969) 10(-3.396,-1.619) 11(-3.396,-2.269) 12(-3.396,-2.919) 13(-3.396,-3.569) 14(-3.396,-4.219) 15(3.404,-4.219) 16(3.404,-3.569) 17(3.404,-2.919) 18(3.404,-2.269) 19(3.404,-1.619) 20(3.404,-0.969) 21(3.404,-0.319) 22(3.404,0.331) 23(3.404,0.981) 24(3.404,1.631) 25(3.404,2.281) 26(3.404,2.931) 27(3.404,3.581) 28(3.404,4.231)
  silkscreen extent -3.52,-5.29 2.1,5.31
TO220_h [mm]
  rect 2x2 hole 1: 1(-2.5,-15.5)
  round 3 hole 1.8: 2(0,-11.5)
  round 2 hole 1: 3(2.5,-15.5)
  silkscreen extent -5,-7.5 5,7.5
trans_ring1 [mm]
  round 2 hole 1: 1(-27.1,12.2) 2(-27.1,7.3) 3(-20.6,-11.475) 4(-16.55,-18.05) 8(-1.7,-26)
  round 2 hole 1 unplated: 7(3.4,-26.1)
  silkscreen extent -15.24,-15.23 15.24,15.25
USBmini [mm]
  round 1.2 hole 1.3: 0(-2.2,5.85) 0(2.2,5.85)
  rect 0.5x2.5 smd: 1(-1.6,8.43) 2(-0.8,8.43) 3(0,8.43) 4(0.8,8.43) 5(1.6,8.45)
  rect 2x2.5 smd: 6(-4.45,3.158) 6(-4.45,8.43) 6(4.45,3.158) 6(4.45,8.43)
  silkscreen extent -4.45,0 4.45,9
XF2M20151A [mm]
  rect 1.7x1.5 smd: 0(-6.4,-1.9) 0(6.4,-1.9)
  rect 0.3x1.5 smd: 1(-4.75,2.05) 2(-4.257,2.059) 3(-3.757,2.059) 4(-3.257,2.059) 5(-2.757,2.059) 6(-2.257,2.059) 7(-1.757,2.059) 8(-1.257,2.059) 9(-0.757,2.059) 10(-0.257,2.059) 11(0.243,2.059) 12(0.743,2.059) 13(1.243,2.059) 14(1.743,2.059) 15(2.243,2.059) 16(2.743,2.059) 17(3.243,2.059) 18(3.743,2.059) 19(4.243,2.059) 20(4.75,2.05)
  silkscreen extent -6.55,-3.03 6.55,2.42
zumm [mm]
  rect 1.5x1.5 hole 1: 1(-3.825,0)
  round 1.5 hole 1: 2(3.81,0)
  silkscreen extent -6,-6 6,6

## Part data
A1: library part PJEZ0, "Beeper"
BT1: library part Battery, "Multicell Battery"
C1 C2 C4 C5 C6 C7 C8: library part "Cap Semi", "Capacitor"
C9 C10 C12 C13 C14 C15 C16 C17 C18 C19 C20 C25 C26 C30 C31 C32 C33 C34 C36 C37 C38 C39 C40 C47 C48 C50 C51 C52 C53 C54 C55 C56: library part "Cap Semi", "Capacitor (Semiconductor SIM Model)"
C21 C22 C27 C28 C29 C35 C41 C42 C43 C44 C45 C46: library part "Cap Pol1", "Polarized Capacitor (Radial)"
D1 D2 D3 D4 D5 D6 D7 D10: library part Diode, "Diode"
D8 D9 D13 D14 D16 D18: library part 10BQ015, "Schottky Rectifier"
D11 D12: library part 10BQ015, "Schottky Diode"
D15: library part "D Zener", "Zener Diode"
D17: "Programmable Precision Reference"
F1: library part "Fuse 1", "Fuse"
J1: library part "Header 6", "Header, 6-Pin"
JP1: "Header, 9-Pin"
JP2: "Header, 7-Pin"
JP3: library part "Header 3", "Header, 3-Pin"
JP4: "Header, 20-Pin"
JP5: "Header, 6-Pin"
JP12: "Header, 3-Pin"
K1 K2 K3 K4 K5 K6 K7: "Single-Pole Dual-Throw Relay"
L1: library part "Inductor Konstr 2", "Magnetic-Core Inductor"
L2: library part L1_dc_2, "Дроссель"
Q1 Q3 Q4 Q7: library part GT122, "Bipolar transistor"
Q10: library part NMOS-2, "N-Channel Power MOSFET"
R1 R2 R3 R4 R5 R6 R7 R8 R9 R10 R11 R12 R13 R14 R15 R17 R18 R19 R20 R23 R28 R30 R31 R32 R33 R34 R35 R36 R37 R38 R39 R40 R41 R42 R43 R44 R45 R46 R47 R48 R49 R50 R51 R52 R53 R54 R55 R56 R57 R58 R59 R60 R61 R62 R63 R64 R65 R66: library part Res2, "Resistor"
R24 R25 R26 R27: library part RES
R29: library part "Res Varistor", "Varistor (Voltage-Sensitive Resistor)"
U1: library part LPC2368FBD100
U2: "Memory"
U5 U9: library part F00817ASD
U10: "800mA and 1A Low Dropout Positive Regulator 2.85V, 3.3V, 5V, and Adjustable"
U11 U12: "3-Terminal Low-Current Positive Fixed Voltage Regulator"
U14: library part KXO-97
X1 X2 X3 X4: library part Socket, "Socket"
Y1 Y2: library part XTAL, "Crystal Oscillator"

## Free pads (board coordinates)
  round 6 hole 1.5: 0(151.325,76.375)

## Via types
v1: diameter 1.2, hole 0.7, Top Layer to Bottom Layer, 302 vias
v2: diameter 1.8, hole 1, Top Layer to Bottom Layer, 5 vias
v3: diameter 2, hole 1.3, Top Layer to Bottom Layer, 2 vias
v4: diameter 3, hole 1.8, Top Layer to Bottom Layer, 2 vias

## Nets (pads, with @x,y where several pads share a name; then routed paths per layer and width w, separated by ;. In a path a pad name is that pad's centre, name@x,y a point inside that pad or via, vN(x,y) a via of type N, cw(c..) or ccw(c..) an arc to the next point about the centre after c; other vN are vias at no path point)
+3V3: C1.1 C5.2 C41.1 C42.1 C47.2 C48.2 C50.2 C51.2 C52.1 C53.1 C54.1 J2.4 J2.5 J2.9 J2.12 JP4.1 R17.2 R52.2 R53.2 R54.2 R55.2 R56.2 R57.2 R58.2 R59.2 R60.1 R61.2 R62.1 U1.10 U1.12 U1.13 U1.28 U1.42 U1.54 U1.71 U1.84 U1.96 U10.2 U10.4 U13.22 U13.32 U13.48 | length 387.4
  Top Layer w0.254: 0,71.525 0.675,70.85 JP4.1@1.15,70.85 ; C5.2@15.643,58.512 17.181,56.975 18.604,56.975 21.35,59.721 v1(21.35,59.725) ; U1.13@23.82,66.08 v1(25.175,64.725) 25.175,65.432 U1.12@24.174,66.434 ; U1.10@24.881,67.141 25.671,66.35 v1(26.65,66.35) ; U1.42@25.234,53.706 26.128,54.6 v1(26.675,54.6) ; v1(30.15,53) 30.536,53 33.295,50.241 C53.1@33.295,41.543 ; v1(30.925,67.35) 30.925,67.882 U1.96@31.952,68.909 ; v1(34.35,63.9) 35.428,63.9 U1.84@36.194,64.666 ; v1(36.175,58.9) 36.657,58.9 U1.71@37.608,57.948 ; U13.22@37.222,82.628 38.324,81.525 v1@38.35,81.525 ; U13.32@38.99,77.43 40.05,78.491 v1(40.05,78.5) ; v1(44.3,81.325) 44.888,81.325 45.3,80.913 ; 45.288,80.925 45.3,80.913 ; U13.48@46.308,79.905 45.3,80.913
  Top Layer w0.5: v1(-5.175,39.175) -5.175,68.225 -3.875,69.525 -1.95,69.525 1.475,72.95 R17.2@3,72.95 ; R54.2@25.18,90.732 28.057,90.732 28.125,90.8 28.4,90.525 R61.2@31.4,90.525 ; R55.2@28.183,90.742 28.183,92.433 28.55,92.8 C47.2@28.55,93.675 ; R56.2@28.475,79.55 28.418,79.607 28.418,85.068 30.975,87.625 31.375,87.625 R62.1@31.375,93.625 ; v1(29.9,90.5) v1@29.9,90.525 ; C50.2@51.6,87.5 51.682,87.582 R59.2@51.682,93.595 54.57,93.595 C48.2@54.625,93.65 ; R60.1@51.682,90.45 55.075,90.45 R53.2@55.3,90.225 ; v1@51.695,80.995 C50.2@51.695,87.602 ; C48.2@54.575,93.7 55.125,93.7 58.082,96.657 R52.2@58.155,96.657
  Top Layer w0.6: C1.1@45.225,60.425 45.25,60.4 v1(46.95,60.4) 46.875,60.325 v1(46.875,39.425)
  Top Layer w1: C42.1@70.275,33.2 76.975,33.2 77.025,33.15 78.975,33.15 80.35,34.525 80.35,36.725 81.525,37.9 ; C52.1@78.85,39.475 80.425,37.9 89.45,37.9 U10.2@89.525,37.975
  Bottom Layer w0.5: v1(-5.175,39.175) -4.925,39.425 v1(46.875,39.425) ; v1(28.418,80.925) 34.95,80.925 35.2,81.175 ; v1(29.9,90.5) 29.9,94.025 38.15,102.275 40.865,102.275 ; J2.12@35.19,109.88 35.19,111.99 36.4,113.2 46.825,113.2 47.875,112.15 J2.9@47.875,111.45 ; J2.5@40.85,100.2 40.85,99.825 42.135,98.54 J2.4@42.135,97.6 ; J2.5@40.865,100.15 40.865,103.59 41.9,104.625 41.9,113.2
  Bottom Layer w0.8: 38.475,60.325 38.55,60.4 48.325,60.4 52.8,55.925 56.65,55.925 64.65,63.925 64.65,67.825 66.45,69.625 66.45,76.125 61.6,80.975 46.7,80.975 46.675,81 ; v1(46.875,39.425) 46.875,39.35 52.989,33.236 C42.1@70.333,33.236 70.358,33.211 C41.1@77.008,33.211
  other v1: 51.675,80.975 38.5,81.55
+5V: A1.1 C2.2 C4.2 C6.2 C29.1 D1.2 D2.2 D3.2 D4.2 D5.2 D6.2 D7.2 JP4.17 JP4.18 K1.5 K2.5 K3.5 K4.5 K5.5 K6.5 K7.5 L1.2 R19.2 R20.1 R28.1 R51.1 R66.2 U2.8 U4.10 U4.16 U6.1 U7.1 U10.3 | length 596.5
  Top Layer w0.254: v1(-0.375,62.6) v1@-0.35,62.6 ; JP4.17@1.1,62.85 -0.35,62.85 -0.35,62.35 -0.343,62.357 JP4.18@1.159,62.357
  Top Layer w0.4: v1(16.325,90.95) U4.16@18.932,90.95 ; v1@16.5,83.3 16.529,83.33 U4.10@18.932,83.33 ; v1(49.675,40.75) 51.2,42.275 51.2,61.5 53.225,63.525 53.225,70.75 53.95,71.475 54.77,71.475 U2.8@56.27,72.975 ; U2.8@56.27,72.825 56.27,74.87 v1(56.3,74.9) ; R20.1@62.818,81.487 65.637,81.487 R19.2@65.675,81.525 ; R66.2@64.025,86.075 64.175,85.925 64.175,81.55 ; 64.225,81.525 64.225,75.05 v1@64.375,74.9
  Top Layer w0.5: 25.008,20.425 25.042,20.391 31.209,20.391 31.275,20.325 D1.2@31.275,20.3 ; K2.5@42.441,13.404 42.441,15.891 46.925,20.375 D2.2@48.375,20.375 ; K3.5@59.874,13.404 59.874,17.449 62.8,20.375 D3.2@62.9,20.375 ; K4.5@97.708,13.404 97.708,18.408 99.5,20.2 D4.2@100.725,20.2 ; K5.5@115.508,13.404 115.508,18.533 116.975,20 D5.2@118.4,20 ; K6.5@132.974,13.404 132.974,18.499 134.866,20.391 D6.2@135.995,20.391 ; K7.5@150.441,13.404 150.441,18.866 152,20.425 D7.2@153.3,20.425
  Top Layer w0.6: R28.1@8.15,45.975 8.112,43.588 8.945,42.755 U6.1@8.945,40.325 ; R51.1@22.112,47.207 22.112,44.807 22.545,44.374 U7.1@22.545,40.325 ; v1@22.545,42.2 v1(22.6,42.2)
  Top Layer w1: v1(-4.6,78.2) -4.3,78.5 13.8,78.5 14.5,79.2 v1@16.6,79.2 ; K1.5@25.008,13.404 25.008,23.408 27.1,25.5 v1(27.1,40.9) ; U10.3@89.5,40.2 93.1,40.2 C6.2@94.3,39 ; C6.2@94.357,39 97.225,39 102.9,33.325 v1@166.8,33.325 ; v1(166.825,33.35) v1@166.825,35.35
  Top Layer w2: L1.2@155.2,42.6 155.201,42.601 C29.1@163.993,42.601
  Bottom Layer w0.4: v1(16.275,79.15) 16.325,79.2 v1(16.325,90.95) ; v1(27.1,40.9) 49.525,40.9 v1(49.675,40.75) ; v1(56.3,74.9) v1@64.375,74.9
  Bottom Layer w0.5: -4.95,62.6 v1(-0.375,62.6)
  Bottom Layer w0.6: 8.9,40.9 8.945,40.945 v1(8.945,42.3) ; 22.6,40.7 v1(22.6,42.2)
  Bottom Layer w1: v1(-4.6,78.2) -5,77.8 -5,41.7 -4.2,40.9 v1(27.1,40.9)
  Bottom Layer w1.5: K1.5@25.008,13.404 29.212,9.2 165.4,9.2 ; 42.3,9.2 42.441,9.341 K2.5@42.441,13.404 ; 59.8,9.2 59.874,9.274 K3.5@59.874,13.404 ; 97.708,9.2 K4.5@97.708,13.404 ; 115.508,9.308 K5.5@115.508,13.404 ; 132.9,9.4 132.974,9.474 K6.5@132.974,13.404 ; 150.441,9.259 K7.5@150.441,13.404 ; C29.1@163.993,42.601 C29.1@164.025,42.601 ; C29.1@164.025,42.575 165.525,42.575 166.75,41.35 166.75,10.525 165.425,9.2
  other v1: 166.825,35.325 64.075,74.975 16.325,83.3
  other v2: 155.25,42.5
+VBAT: BT1.1 U1.19 | length 68.4
  Top Layer w0.254: v1(13.925,74.35) 13.8,74.225 13.8,69.875 15.4,68.275 17.382,68.275 U1.19@21.699,63.959
  Top Layer w0.4: v1(54.4,70.15) 54.516,70.034 54.516,60.184 BT1.1@54.55,60.15
  Bottom Layer w0.254: v1(13.925,74.35) 20.075,74.35 20.4,74.025 22.975,74.025 23.875,74.925 24.85,74.925 25.75,74.025 29.55,74.025 30.625,72.95 34.865,72.95 35.382,73.467 38.218,73.467 39.145,72.54 46.36,72.54 48.775,70.125 54.4,70.125 v1@54.475,70.125
A: JP3.1 U6.12 | length 39.4
  Top Layer w0.6: v1(2.2,13.4) 2.7,13.9 2.7,28 3.865,29.165 U6.12@3.865,31.075
  Bottom Layer w0.6: v1(2.2,13.4) 2.8,12.8 2.8,-6.1 JP3.1@3.7,-7
B: JP3.2 U6.13 | length 41.4
  Top Layer w0.6: U6.13@5.135,31.075 5.135,28.235 4.1,27.2 4.1,12.6 2.9,11.4 2.9,-1.1 8.78,-6.98 JP3.2@8.78,-7
GND: BT1.2 C1.2 C2.1 C4.1 C5.1 C6.1 C7.1 C8.1 C9.1 C10.1 C15.1 C16.1 C17.1 C18.1 C20.1 C27.2 C28.2 C29.2 C41.2 C42.2 C47.1 C48.1 C50.1 C51.1 C52.2 C53.2 C54.2 C55.2 C56.2 D17.2 D17.3 D17.6 D17.7 J2.8 JP4.2 JP4.19 JP4.20 L2.7 Q1.1 Q1.3 Q3.1 Q3.3 Q4.1 Q4.3 Q7.1 Q7.3 R9.1 R10.1 R11.1 R12.1 R13.1 R14.1 R15.1 R18.1 R41.2 R63.1 U1.11 U1.15 U1.31 U1.41 U1.55 U1.72 U1.83 U1.97 U2.4 U4.9 U4.15 U5.3 U6.2 U6.8 U7.2 U7.8 U10.1 U13.15 U13.19 U13.35 U13.36 U13.47 U14.2 | length 72.7
  Top Layer w0.254: -0.35,69.85 0.157,70.357 2.257,70.357 2.875,70.975 ; JP4.20@1.2,61.3 1.159,61.341 JP4.19@1.159,61.857 2.818,61.857 v1@2.825,61.85 ; U1.31@21.345,57.595 22.625,58.875 22.85,58.875 ; U1.15@23.113,65.373 24,64.486 24,63.325 ; U1.11@24.527,66.787 25.964,65.35 26.072,65.35 26.222,65.2 ; U1.41@24.881,54.059 25.625,54.804 25.625,55.7 ; 29.675,68.5 30.836,68.5 U1.97@31.598,69.262 ; 31.3,54.75 31.3,52.943 U1.55@31.952,52.291 ; 35.45,80.925 37.125,80.925 ; 35.725,63 35.725,63.489 U1.83@36.548,64.312 ; 37.2,60.175 37.2,59.064 U1.72@37.962,58.302 ; U13.19@38.282,83.688 39,82.971 39,82.675 39.925,81.75 v1@39.925,81.5 ; U13.15@39.697,85.102 41.4,83.399 ; U13.36@40.404,76.016 40.404,76.046 40.065,76.385 40.05,76.4 41.125,77.475 41.125,79.1 40.525,79.7 40.475,79.7 ; v1(42.25,82.5) v1@42.25,82.549 ; 44.1,80.1 44.55,80.1 44.65,80.2 45.307,80.2 U13.47@45.955,79.552
  Top Layer w0.3: 35.425,80.975 35.468,80.932 ; 37.143,80.932 38.3,79.775 v1@38.6,79.775 ; v1(39.075,79.6) v1@39.1,79.625 ; 42.225,88.35 41.4,87.525 41.4,83.35 v1(42.25,82.5)
  Top Layer w0.4: U6.2@7.675,40.325 7.675,38 v1@7.7,37.975 ; U7.2@21.275,40.325 21.275,38.175 21.325,38.125 v1(21.325,38.1)
  Top Layer w0.5: v1(104.2,38.1) 104.268,38.168 D17.2@104.268,40.089 D17.3@105.538,40.089 ; v1(104.2,47.4) 104.2,45.325 104.275,45.25 104.314,45.289 D17.6@105.538,45.289
  Bottom Layer w0.3: v1@39.95,81.2 41.25,82.5 v1(42.25,82.5)
  Bottom Layer w0.5: v1(39.075,79.6) 39.075,80.325 v1@39.95,81.2
  Bottom Layer w1.5: 154.7,44.525 L2.7@154.7,50.3
  Bottom Layer w2: 163.125,30.6 163.125,35.6
  other v1: 35.2,18.05 50.2,18.1 62.9,18.125 68.975,18.15 130.55,18.15 140.6,18.15 57.625,18.225 125.775,18.225 27.875,18.3 106.25,18.3 41.5,18.325 74.75,18.375 159.725,18.375 147.275,18.5 112.5,18.55 81,19.1 93.1,19.175 87.1,19.2 129.15,21.5 162.425,22.425 98.125,23 105.7,23.05 140.75,23.3 36.1,23.35 55.4,23.35 67.85,23.35 28.85,23.6 47.975,24.5 93.025,25.025 81.075,25.05 86.9,25.1 153.2,25.175 131.7,26.125 125.05,26.2 117.9,26.3 162.1,29.85 154.6,29.975 146.225,30 81.1,30.775 88.45,30.8 116.275,30.8 108.9,30.85 123.8,30.85 131.625,30.85 95.05,30.9 101.85,30.9 39.9,31.025 72.475,31.2 33.5,35.975 97.2,36.025 42,36.075 37.45,36.175 157.6,36.75 62.5,37.475 133.4,37.475 116.4,37.8 7.675,38.075 99.6,40.05 79.825,42.3 70.35,42.4 89.25,42.425 29.3,43.35 42.225,43.5 37.4,43.55 13.1,43.7 49,43.75 -1,43.85 54.95,44.9 62.5,44.925 126.4,46.325 116.5,46.45 -1.3,51.2 62.4,52.35 55.05,52.525 45.2,53.4 19.9,55.15 49.025,55.2 40.25,56.4 44.75,57.8 62.125,58.9 59.05,61.25 3.15,61.475 49.05,61.725 8.375,63.1 59.875,64.15 -2.275,67.15 14.35,67.525 22.125,68.8 7.075,69.575 26.45,72.1 9.6,72.3 62.4,72.975 0.125,74.8 7.75,76.325 57.625,76.325 19,79.55 39.925,81.45 33.7,82.25 65.9,84 44.65,86.55 36.4,87.825 53.675,88.05 61.1,88.7 22.1,89.85 47.075,92.25 25.775,93.3 19.675,94.075 43.3,94.75 39.8,94.875 51.6,97.575 30.8,98.725 61.2,99.45
GND_GND: C30.1 C31.1 C32.2 C33.2 JP12.3 | length 108.1
  Bottom Layer w1.5: JP12.3@73.74,106.9 73.74,102.66 75.65,100.75 127.15,100.75 C31.1@127.625,101.225 ; C32.2@91.508,113.398 126.848,113.398 C33.2@127.45,114 ; 109.55,100.7 109.55,113.475
GND_USB: C12.1 C13.1 C14.1 J1.5 J1.6 U3.7 U3.18 U3.21 U3.25 U3.26 U4.2 U4.8 | length 38.9
  Top Layer w0.254: 4.8,104.725 4.869,104.656 4.869,100.956 4.875,100.95 ; 5.45,101.075 5.519,101.144 5.519,104.531 5.45,104.6 ; v1(7.35,82.325) 7.45,82.325 7.715,82.06 U4.8@9.682,82.06 ; 7.5,93.05 v1(8.2,93.05) ; 9.55,104.5 9.55,104.175 10.069,103.656 U3.18@10.069,102.604
  Top Layer w0.3: U3.21@8.119,102.604 8.119,99.819 7.469,99.169 7.469,90.131 7.92,89.68 U4.2@9.682,89.68
  Bottom Layer w0.4: v1(7.35,82.325) 7.35,88.2 8.175,89.025 8.175,93.025 v1(8.2,93.05)
  other v1: 1.025,83.1 10.575,98.725 1.8,98.975 2,104.475 14.65,105.2 2.175,109.85 19.125,114.575 2.3,114.65
LA: J2.2 R60.2 U13.16 | length 24.2
  Top Layer w0.3: v1(39.1,90.5) 38.4,89.8 38.4,85.692 U13.16@39.343,84.749 ; J2.2@44.675,97.6 44.6,97.525 44.6,93.2 46.4,91.4 v1(46.4,90.5) 46.505,90.605 R60.2@48.918,90.605
  Bottom Layer w0.3: v1(39.1,90.5) v1(46.4,90.5)
LB: J2.1 R59.1 U13.17 | length 27
  Top Layer w0.3: v1(38.6,93.6) 37.7,92.7 37.7,85.685 U13.17@38.99,84.395 ; J2.1@45.945,100.15 45.945,93.645 45.995,93.595 R59.1@48.882,93.595
  Bottom Layer w0.3: v1(38.6,93.6) v1(45.99,93.6)
LC: J2.3 R61.1 U13.14 | length 23.2
  Top Layer w0.3: R61.1@34.218,90.605 v1(35.995,90.605) ; U13.14@40.05,85.456 39.2,86.306 39.2,87.8 40.2,88.8 40.2,93.5 43.405,96.705 J2.3@43.405,100.15
  Bottom Layer w0.3: v1(35.995,90.605) 37.09,91.7 v1(40.2,91.7)
LD: J2.6 R62.2 U13.13 | length 20.7
  Top Layer w0.3: R62.2@34.182,93.595 36.595,93.595 39.595,96.595 J2.6@39.595,97.6 ; U13.13@40.404,85.81 40.404,87.704 41.6,88.9 v1(41.6,92.4)
  Bottom Layer w0.3: v1(36.595,93.695) 36.6,93.7 37.9,92.4 38.9,92.4 39.4,92.9 41.1,92.9 v1(41.6,92.4)
LG: R55.1 R64.2 U13.28 | length 71.1
  Top Layer w0.254: v1@26.075,78.375 26.4,78.7 26.4,85.875 v1(26.3,85.975) ; v1@26.075,85.927 R55.1@28.13,87.982 ; v1@35.7,77.475 36.206,77.475 U13.28@37.575,78.845 ; R64.2@57.682,100.67 58.08,100.67 60.6,98.15 60.6,91.4 60.637,91.362 v1@60.675,91.325
  Bottom Layer w0.3: v1(26.075,78.325) 26.475,77.925 32.45,77.925 32.8,78.275 34.9,78.275 35.612,77.562 v1@35.7,77.475 ; v1@26.075,85.75 37.225,85.75 41.025,89.55 58.825,89.55 v1(60.65,91.375)
  other v1: 35.45,77.475
LH: R53.1 R65.2 U13.26 | length 93.3
  Top Layer w0.254: v1(24.425,73.975) 24.425,76.1 23.575,76.95 23.575,79.625 24.445,80.495 R65.2@24.445,81.093 ; v1(31.35,72) 32.4,73.05 32.4,79.7 33,80.3 33.975,80.3 35.375,78.9 36.2,78.9 U13.26@36.825,79.525 ; R53.1@58.175,90.125 63.525,90.125 67.475,86.175 67.475,72.875 v1(64.725,70.125)
  Bottom Layer w0.3: v1(24.425,73.975) 24.925,73.475 29.325,73.475 30.8,72 34.575,72 35.575,73 38.025,73 39.025,72 46.15,72 49.35,68.8 63.325,68.8 v1@64.65,70.125
NetA1_2: A1.2 Q3.7 Q3.8 | length 15.2
  Top Layer w0.5: Q3.7@71.615,20.788 75.162,20.788 79.05,16.9 A1.2@85.2,16.9
NetA?_1: 
NetA?_2: 
NetC7_2: C7.2 U1.22 Y1.2 | length 13.9
  Top Layer w0.254: C7.2@12.093,71.012 12.093,67.614 Y1.2@12.1,67.608 13.508,66.2 17.336,66.2 U1.22@20.638,62.898
NetC8_2: C8.2 U1.23 Y1.1 | length 12.9
  Top Layer w0.254: C8.2@12.007,59.488 12.1,59.581 Y1.1@12.1,62.608 13.992,64.5 18.329,64.5 U1.23@20.284,62.545
NetC9_2: C9.2 U1.16 Y2.2 | length 9.9
  Top Layer w0.254: C9.2@21.412,71.807 20.703,71.807 Y2.2@18.801,69.905 18.801,68.977 U1.16@22.759,65.019
NetC10_2: C10.2 U1.18 Y2.1 | length 16
  Top Layer w0.254: C10.2@13.288,76.493 13.532,76.493 15.05,74.975 15.05,71.156 Y2.1@16.301,69.905 16.46,69.905 U1.18@22.052,64.312
NetC12_2: C12.2 R24.2 U3.20 U4.1 U4.7 U5.1 | length 51.6
  Top Layer w0.3: U5.1@5.2,85.4 5.2,84.7 6.57,83.33 U4.7@9.682,83.33 11.63,83.33 11.9,83.6 11.9,91.875 14.2,94.175 14.2,100.3 ; C12.2@8.588,108.193 8.588,104.912 8.769,104.731 8.769,101.231 9.7,100.3 21.981,100.3 R24.2@24.093,102.412 ; U4.1@9.682,90.95 11.9,90.95
NetC13_2: C13.2 J1.1 R24.1 | length 21.7
  Top Layer w0.3: C13.2@8.595,114.202 10.698,114.202 12.9,112 15.3,112 16.1,112.8 18.1,112.8 20.6,110.3 20.6,107.6 21.4,106.8 22.9,106.8 24.093,105.607 R24.1@24.093,105.212
NetC14_2: C14.2 U3.4 U3.17 | length 21.1
  Top Layer w0.3: U3.4@5.519,95.804 v1(5.519,99.881) ; C14.2@8.595,111.202 9.298,111.202 10.719,109.781 U3.17@10.719,102.604
  Bottom Layer w0.3: v1(5.519,99.881) 10.338,104.7 v1(10.7,104.7)
NetC15_2: C15.2 R28.2 U6.7 | length 9.1
  Top Layer w0.254: 1.325,43.225 1.325,44.6 2.3,45.575 2.3,46 R28.2@5.325,46
  Top Layer w0.3: U6.7@1.325,40.325 1.325,43.225
NetC16_2: C16.2 R51.2 U7.7 | length 10.4
  Top Layer w0.4: U7.7@14.925,40.325 14.925,44.225 16.388,45.688 C16.2@16.388,47.193 19.299,47.193 R51.2@19.312,47.207
NetC19_1: C19.1 C20.2 C21.2 C22.2 C33.1 C34.1 C35.2 C37.2 C38.2 C39.1 D15.1 L2.3 R42.1 R43.1 R46.2 R47.2 R48.2 R49.2 T1.2 U8.6 U9.3 | length 250
  Top Layer w0.5: v1(74.2,55.55) 76.475,53.275 83.425,53.275 84.4,54.25 84.4,57.594 C39.1@84.612,57.807 85.612,58.807 C19.1@85.612,61.307 85.612,64.718 C38.2@85.688,64.793 ; R42.1@75.707,66.288 78.569,66.288 C37.2@78.594,66.313 ; U9.3@84.4,55 84.512,54.888 100.062,54.888 102.375,52.575 121.225,52.575 121.325,52.475 ; v1(84.5,70.1) 85.138,69.462 U8.6@86.989,69.462 ; v1(85.6,63.2) v1@85.612,63.2
  Top Layer w0.6: D15.1@91.72,81.891 91.72,84.52 v1(91.725,84.525)
  Top Layer w1: C20.2@121.277,51.208 121.277,53.252 123.825,55.8 129.875,55.8 131.2,57.125 131.2,64.45 130.75,64.9 L2.3@130.75,64.925 ; R46.2@130.375,84.025 R46.2@130.75,83.65
  Top Layer w1.2: R49.2@130.138,87.843 130.625,87.356 130.625,64.9 L2.3@130.65,64.875
  Bottom Layer w0.4: v1(74.2,55.55) 74.2,63.388 v1(77.1,66.288) ; v1(84.5,70.1) 84.5,64.3 v1(85.6,63.2)
  Bottom Layer w0.6: C21.2@75.708,85.611 C22.2@81.907,85.611 85.314,85.611 88.825,82.1 88.825,79.1 84.5,74.775 v1(84.5,70.1) ; 88.825,81.625 v1(91.725,84.525)
  Bottom Layer w1.5: L2.3@130.8,65 130.8,83.25 143.95,96.4 143.95,107.225 139.225,111.95 C35.2@137.7,111.95
  Bottom Layer w2: T1.2@114.6,107.3 127,107.3 131.65,111.95 C35.2@137.65,111.95 ; 120.6,107.3 120.7,107.4 C34.1@120.7,109.1 ; C33.1@127.508,106.398 127.508,107.808
  other v2: 130.75,73.575 130.65,77.925 130.8,81.975
NetC19_2: C19.2 D14.2 R37.1 | length 18.3
  Top Layer w0.4: D14.2@89.525,61.3 D14.2@89.531,61.306
  Top Layer w0.5: R37.1@74.712,62.907 79.193,62.907 80.793,61.307 C19.2@82.812,61.307
  Top Layer w0.6: v1@87.815,61.3 D14.2@89.975,61.3
  Bottom Layer w0.6: v1(80.6,61.5) 80.8,61.3 v1(87.85,61.325)
NetC21_1: C21.1 C22.1 D13.2 D15.2 R35.1 U8.8 | length 38
  Top Layer w0.5: v1(86.8,80) 88.791,78.009 D13.2@88.791,77.006
  Top Layer w0.6: v1(86.8,80) 88.691,81.891 D15.2@88.92,81.891 ; U8.8@86.989,72.002 86.989,72.689 88.104,73.804 99.574,73.804 R35.1@100.963,75.192 ; 88.791,73.804 D13.2@88.791,77.006
  Bottom Layer w0.5: C21.1@75.708,83.111 83.689,83.111 v1(86.8,80)